# EAGLE board leonardo01 (EAGLE 7.5.0)
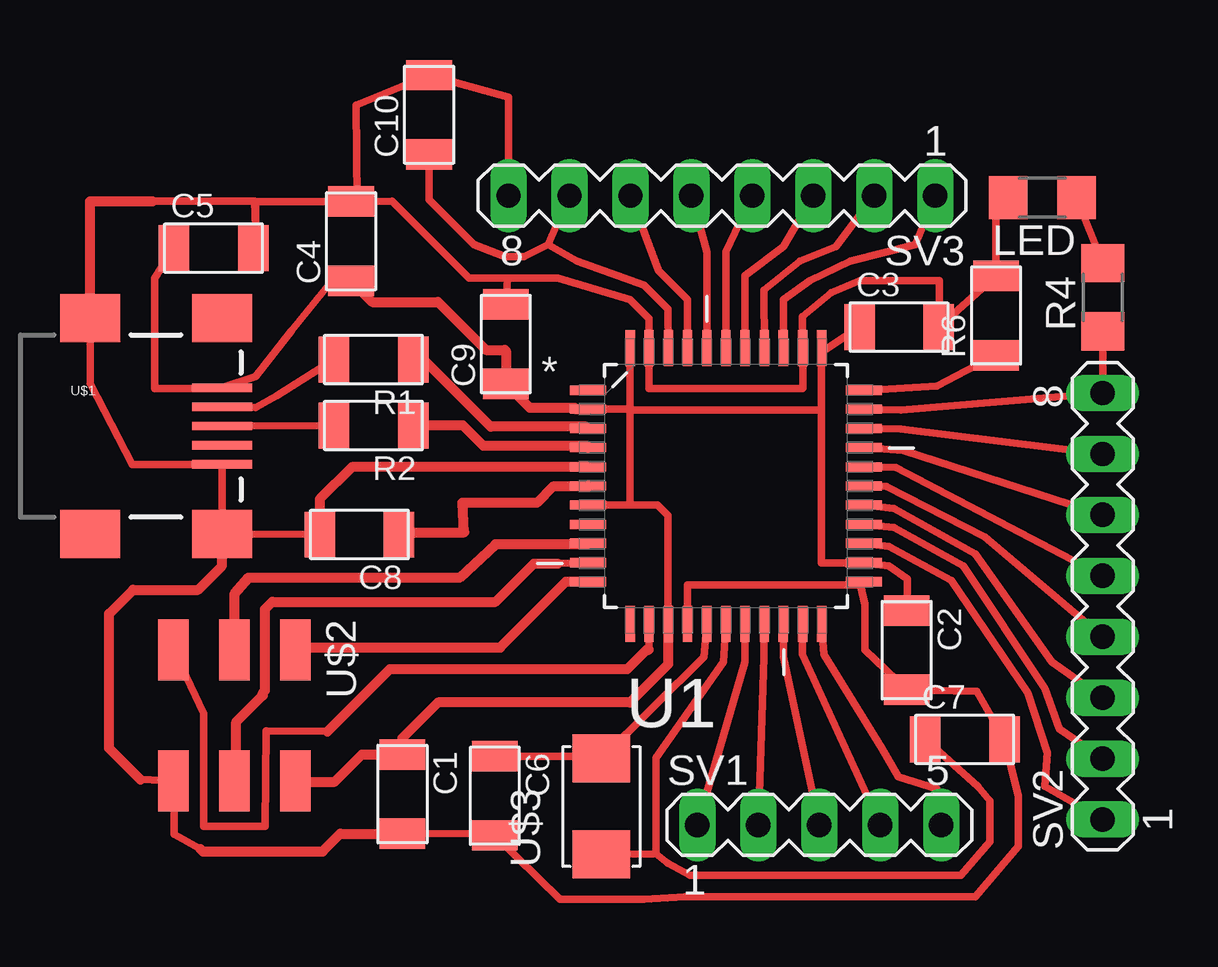
[diagram p0: board, top side]

No outline drawn. Coordinates in mm, seen from the top.
Copper layers (1*16): Top 0.035mm / dielectric 1.5mm / Bottom 0.035mm
Design rules "default *": minimum track width 10mil, minimum drill 24mil, track to track 0.3mm, track to pad 0.3mm, pad to pad 0.3mm, via to via 0.3mm, smd to smd 0.3mm, copper to edge 40mil, drill to drill 0.4mm, minimum pad ring 10mil, minimum via ring 8mil, stop-mask expansion 4mil, vias tented up to drill 0mil, thermal gap 10mil

## Footprints (pad centres in the part's own frame; a part is rotated, then mirrored left to right if it is on the bottom)
C1206FAB = smd 1.27 x 1.905: 1 -1.651,0; 2 1.651,0
1206 = smd 1.6 x 1.803: 1 -1.422,0; 2 1.422,0
R1206FAB = smd 1.27 x 1.905: 1 -1.651,0; 2 1.651,0
MA05-1 = drill 1.016 long: 1 -5.08,0; 2 -2.54,0; 3 0,0; 4 2.54,0; 5 5.08,0
MA08-1 = drill 1.016 long: 1 -8.89,0; 2 -6.35,0; 3 -3.81,0; 4 -1.27,0; 5 1.27,0; 6 3.81,0; 7 6.35,0; 8 8.89,0
QFP80P1200X1200X120-44N = smd 1.5 x 0.38: 1 -5.74,3.988; 2 -5.74,3.2; 3 -5.74,2.388; 4 -5.74,1.6; 5 -5.74,0.787; 6 -5.74,0; 7 -5.74,-0.787; 8 -5.74,-1.6; 9 -5.74,-2.388; 10 -5.74,-3.2; 11 -5.74,-3.988; 23 5.74,-3.988; 24 5.74,-3.2; 25 5.74,-2.388; 26 5.74,-1.6; 27 5.74,-0.787; 28 5.74,0; 29 5.74,0.787; 30 5.74,1.6; 31 5.74,2.388; 32 5.74,3.2; 33 5.74,3.988 | smd 0.38 x 1.5: 12 -3.988,-5.74; 13 -3.2,-5.74; 14 -2.388,-5.74; 15 -1.6,-5.74; 16 -0.787,-5.74; 17 0,-5.74; 18 0.787,-5.74; 19 1.6,-5.74; 20 2.388,-5.74; 21 3.2,-5.74; 22 3.988,-5.74; 34 3.988,5.74; 35 3.2,5.74; 36 2.388,5.74; 37 1.6,5.74; 38 0.787,5.74; 39 0,5.74; 40 -0.787,5.74; 41 -1.6,5.74; 42 -2.388,5.74; 43 -3.2,5.74; 44 -3.988,5.74
USB_MINIB = smd 2.5 x 0.35: D+ 3.77,0; D- 3.77,0.8; GND 3.77,-1.6; ID 3.77,-0.8; VBUS 3.77,1.6 | smd 2.5 x 2: SHIELD@1 -1.73,-4.5; SHIELD@2 -1.73,4.5; SHIELD@3 3.77,4.5; SHIELD@4 3.77,-4.5
2X03SMD = smd 2.54 x 1.27: 1 -2.54,2.54; 2 2.92,2.54; 3 -2.54,0; 4 2.92,0; 5 -2.54,-2.54; 6 2.92,-2.54
2-SMD-5X3MM = smd 2 x 2.4: P$1 -2,0; P$2 2,0

## Placement (x,y rotation side)
C1  0.1uF  [C1206FAB]  40.23,5.39 270 top
C2  0.1uF  [C1206FAB]  61.24,11.39 270 top
C3  0.1uF  [C1206FAB]  60.93,24.85 0 top
C4  0.1uF  [C1206FAB]  38.09,28.43 90 top
C5  0.1uF  [C1206FAB]  32.35,28.14 0 top
C6  18pF  [C1206FAB]  44.07,5.32 270 top
C7  18pF  [C1206FAB]  63.67,7.66 0 top
C8  0.1uF  [C1206FAB]  38.43,16.2 180 top
C9  0.1uF  [C1206FAB]  44.54,24.15 90 top
C10  0.1uF  [C1206FAB]  41.33,33.7 90 top
LED  [1206]  66.9,30.25 180 top
R1  22ohm  [R1206FAB]  39.02,23.5 180 top
R2  22ohm  [R1206FAB]  39.02,20.75 180 top
R4  499  [1206]  69.42,26.1 90 top
R6  680  [R1206FAB]  64.97,25.34 90 top
SV1  [MA05-1]  57.6,4.1 0 top
SV2  [MA08-1]  69.42,13.21 90 top
SV3  [MA08-1]  53.54,30.34 180 top
U1  ATMEGA32U4-AU  [QFP80P1200X1200X120-44N]  53.71,18.23 0 top
U$1  USB_MINIB  [USB_MINIB]  28.93,20.73 0 top
U$2  AVRISPSMD  [2X03SMD]  33.22,8.87 270 top
U$3  CRYSTAL  [2-SMD-5X3MM]  48.52,4.87 90 top

## Library data of the parts
C1-C10 R1 R2 R6 U$1-U$3 = fab
LED R4 = ng
SV1 = con-lstb; OC_FARNELL: unknown; OC_NEWARK: unknown
SV2 SV3 = con-lstb
U1 = Atmel_By_element14_Batch_1; MPN: ATMEGA32U4-AU; OC_FARNELL: 1748525; OC_NEWARK: 26R5633; PACKAGE: TQFP-44; SUPPLIER: Atmel

## Nets
A0: SV3.1 U1.36
A1: SV3.2 U1.37
A2: SV3.3 U1.38
A3: SV3.4 U1.39
A4: SV3.5 U1.40
A5: SV3.6 U1.41
AREF: C10.1 SV3.7 U1.42
D0: SV1.3 U1.20
D1: SV1.4 U1.21
D2: SV1.2 U1.19
D3: SV1.1 U1.18
D4: SV2.1 U1.25
D5: SV2.7 U1.31
D6: SV2.3 U1.27
D7: U1.1
D8: SV2.4 U1.28
D9: SV2.5 U1.29
D10: SV2.6 U1.30
D11: U1.12
D12: SV2.2 U1.26
D13: R4.1 SV2.8 U1.32
D14: U1.8
D15: U1.9 U$2.3
D16: U1.10 U$2.4
D17: U1.11 U$2.1
D+: R2.1 U1.4
D-: R1.1 U1.3
GND: C1.2 C2.2 C3.2 C4.2 C5.2 C6.2 C7.2 C8.2 C9.2 C10.2 LED.2 R6.2 SV3.8 U1.5 U1.15 U1.23 U1.35 U1.43 U$1.GND U$1.SHIELD@2 U$1.SHIELD@4 U$2.6
N$1: R1.2 U$1.D-
N$2: R2.2 U$1.D+
N$3: LED.1 R4.2
N$35: R6.1 U1.33
RESET: U1.13 U$2.5
TXLED: SV1.5 U1.22
UCAP: C8.1 U1.6
VCC: C1.1 C2.1 C3.1 C4.1 C5.1 C9.1 U1.2 U1.7 U1.14 U1.24 U1.34 U1.44 U$1.VBUS U$2.2
XTAL1: C7.1 U1.17 U$3.P$1
XTAL2: C6.1 U1.16 U$3.P$2

## Tracks (layer width: path | path; a pad name or v marks a point on that pad's centre or on a via)
A0
  Top 0.305: U1.36 56.1,26 57.2,26.8 58.9,27.6 61.6,28.3 SV3.1
A1
  Top 0.305: U1.37 55.3,26.4 56.8,27.6 58.3,28.2 SV3.2
A2
  Top 0.305: U1.38 54.5,27 56.1,28.2 SV3.3
A3
  Top 0.305: U1.39 53.7,28 SV3.4
A4
  Top 0.305: U1.40 52.93,27.99 SV3.5
A5
  Top 0.305: U1.41 52.1,26 50.9,27.2 SV3.6
AREF
  Top 0.305: C10.1 41.33,30.17 43.2,28.3 44.5,27.8 45.3,27.8 46.3,28.3 | 46.3,28.3 SV3.7 | U1.42 51.3,25.6 50.3,26.6 47.5,27.6 46.3,28.3
D0
  Top 0.305: SV1.3 56.1,11.1 U1.20
D1
  Top 0.305: SV1.4 56.9,11.2 U1.21
D2
  Top 0.305: SV1.2 55.3,11.1 U1.19
D3
  Top 0.305: SV1.1 54.5,10.9 U1.18
D4
  Top 0.305: U1.25 60.5,15.7 63.1,14.3 66.3,9.6 67.1,7.1 67,5.7 SV2.1
D5
  Top 0.305: U1.31 61,20.6 SV2.7
D6
  Top 0.305: U1.27 60.7,17.3 64.1,15.4 67.3,10.9 SV2.3
D8
  Top 0.305: U1.28 60.4,18.2 64.5,16.1 SV2.4
D9
  Top 0.305: U1.29 60.8,19 SV2.5
D10
  Top 0.305: U1.30 61.1,19.7 SV2.6
D12
  Top 0.305: U1.26 60.7,16.5 63.6,14.9 67,9.8 67.6,8.1 SV2.2
D13
  Top 0.305: U1.32 61,21.4 SV2.8 R4.1
D15
  Top 0.406: U1.9 47.93,15.8 44.1,15.8 42.6,14.4 33.8,14.4 33.22,13.72 U$2.3
D16
  Top 0.305: 46.7,15 U1.10
  Top 0.406: U$2.4 33.3,6.03 33.3,8.4 34.4,9.5 34.4,9.6 34.5,9.7 34.5,13.1 34.8,13.4 44.1,13.4 45.7,15 46.7,15
D17
  Top 0.406: U$2.1 35.85,11.5 44.3,11.5 47.04,14.24 U1.11
D+
  Top 0.406: U1.4 47.9,19.9 43.6,19.9 42.75,20.75 R2.1
D-
  Top 0.406: U1.3 47.89,20.7 43.9,20.7 41.1,23.5 R1.1
GND
  Top 0.305: SV3.8 44.66,34.44 C10.2 | 38.33,30.09 C4.2 39.8,30.1 43,26.9 44.6,26.9 | 38.33,30.09 38.3,34.1 C10.2 | 41.05,35.35 C10.2 | U1.15 52.1,14.1 59.31,14.1 | U1.23 59.31,14.1 | 34.1,29 34.1,28.24 C5.2 | 44.6,26.9 46.7,26.9 49.7,26 50.5,25.2 U1.43 50.5,22.3 56.9,22.3 56.91,22.31 U1.35 56.9,25.3 58.1,26.3 59.3,26.8 62.6,26.8 C3.2 R6.2 64.96,30.18 LED.2 | 59.31,14.1 59.5,13.3 59.5,11.4 C2.2 64.17,9.68 C7.2 65.9,5.3 65.9,3.2 64.1,1.1 52,1.1 50.3,1 46.8,1 C6.2 43.5,3.76 C1.2 | 31.8,3.1 30.7,3.7 U$2.6 29.3,6 | C8.2 U$1.SHIELD@4 U$1.GND 28.97,19.13 27.2,22.5 U$1.SHIELD@2 | C9.2 44.6,26.9 | 29.8,30.1 34.07,30.1 34.1,29 | 38.33,30.09 34.11,30.08 34.1,29
  Top 0.406: C8.2 36.78,17.68 38.12,19.02 U1.5 | 29.3,6 28,7.3 28,12.9 29,13.9 31.7,13.9 32.7,14.9 U$1.SHIELD@4 | 31.8,3.1 31.9,3 36.9,3 37.63,3.73 C1.2 | U$1.SHIELD@2 27.2,30.1 29.8,30.1
N$1
  Top 0.305: R1.2 35,22 34.1,21.5 U$1.D-
N$2
  Top 0.305: R2.2 U$1.D+
N$3
  Top 0.305: LED.1 R4.2
N$35
  Top 0.305: U1.33 62.5,22.4 R6.1
RESET
  Top 0.305: U1.13 50.5,11.4 | 37.1,8 34.53,8.02 34.51,4.05 31.94,4.05 31.94,8.74 U$2.5
  Top 0.406: 37.1,8 39.7,10.6 49.6,10.6 50.4,11.4 50.5,11.4
TXLED
  Top 0.305: SV1.5 62.5,5.6 60.9,6.1 60.2,7.3 57.8,11.2 U1.22
UCAP
  Top 0.406: C8.1 40.18,16.3 42.8,16.3 42.73,17.53 45.83,17.53 46.5,18.2 47.94,18.2 U1.6
VCC
  Top 0.305: C3.1 57.79,23.88 U1.34 57.7,21.4 | U1.14 51.3,12.51 51.3,17 50.86,17.44 49.7,17.44 | 49.7,17.44 U1.7 | 57.7,21.4 49.7,21.4 | 49.7,21.43 49.7,23.97 U1.44 | 47.97,21.4 U1.2 49.7,21.43 | 57.7,21.4 57.7,15.03 U1.24 60.5,14.9 61.27,14.36 C2.1 | 49.7,21.4 49.7,17.44 | 49.7,21.4 49.7,21.43 | C5.1 29.9,26.9 29.9,22.3 32.7,22.3 U$1.VBUS 34.1,22.8 35.6,24.7 37.3,26.8 C4.1
  Top 0.406: C4.1 38.97,25.9 41.7,25.9 43.7,23.9 44.5,23.9 44.54,23.86 C9.1 45.53,21.5 47.4,21.5 47.47,21.43 U1.2 | U1.14 51.3,12.47 51.3,10.8 49.7,9.2 41.7,9.2 40.23,7.73 C1.1 38.54,7.04 37.4,5.9 35.8,5.9 U$2.2
XTAL1
  Top 0.305: C7.1 64.2,5.7 64.7,5.1 64.7,3.4 63.5,2 52.2,2 51.3,2.5 50.8,2.9 | 50.8,2.9 U$3.P$1 | 50.8,2.9 50.8,6.9 53.6,10.9 U1.17
XTAL2
  Top 0.305: U1.16 52.8,11.1 U$3.P$2 48.07,6.97 C6.1

## Text on the board
200bmp: C:/Users/LuizHenrique/Desktop/FabAcademy/_Final Project/myBoards/Jalapino/JLPINO_03.bmp
208bmp: C:/Users/LuizHenrique/Desktop/FabAcademy/_Final Project/myBoards/Jalapino/JLPINO_03.bmp
210bmp: C:/Users/LuizHenrique/Desktop/FabAcademy/_Final Project/myBoards/Jalapino/JLPINO_03.bmp